# EAGLE board higheTemp (EAGLE 9.5.2)
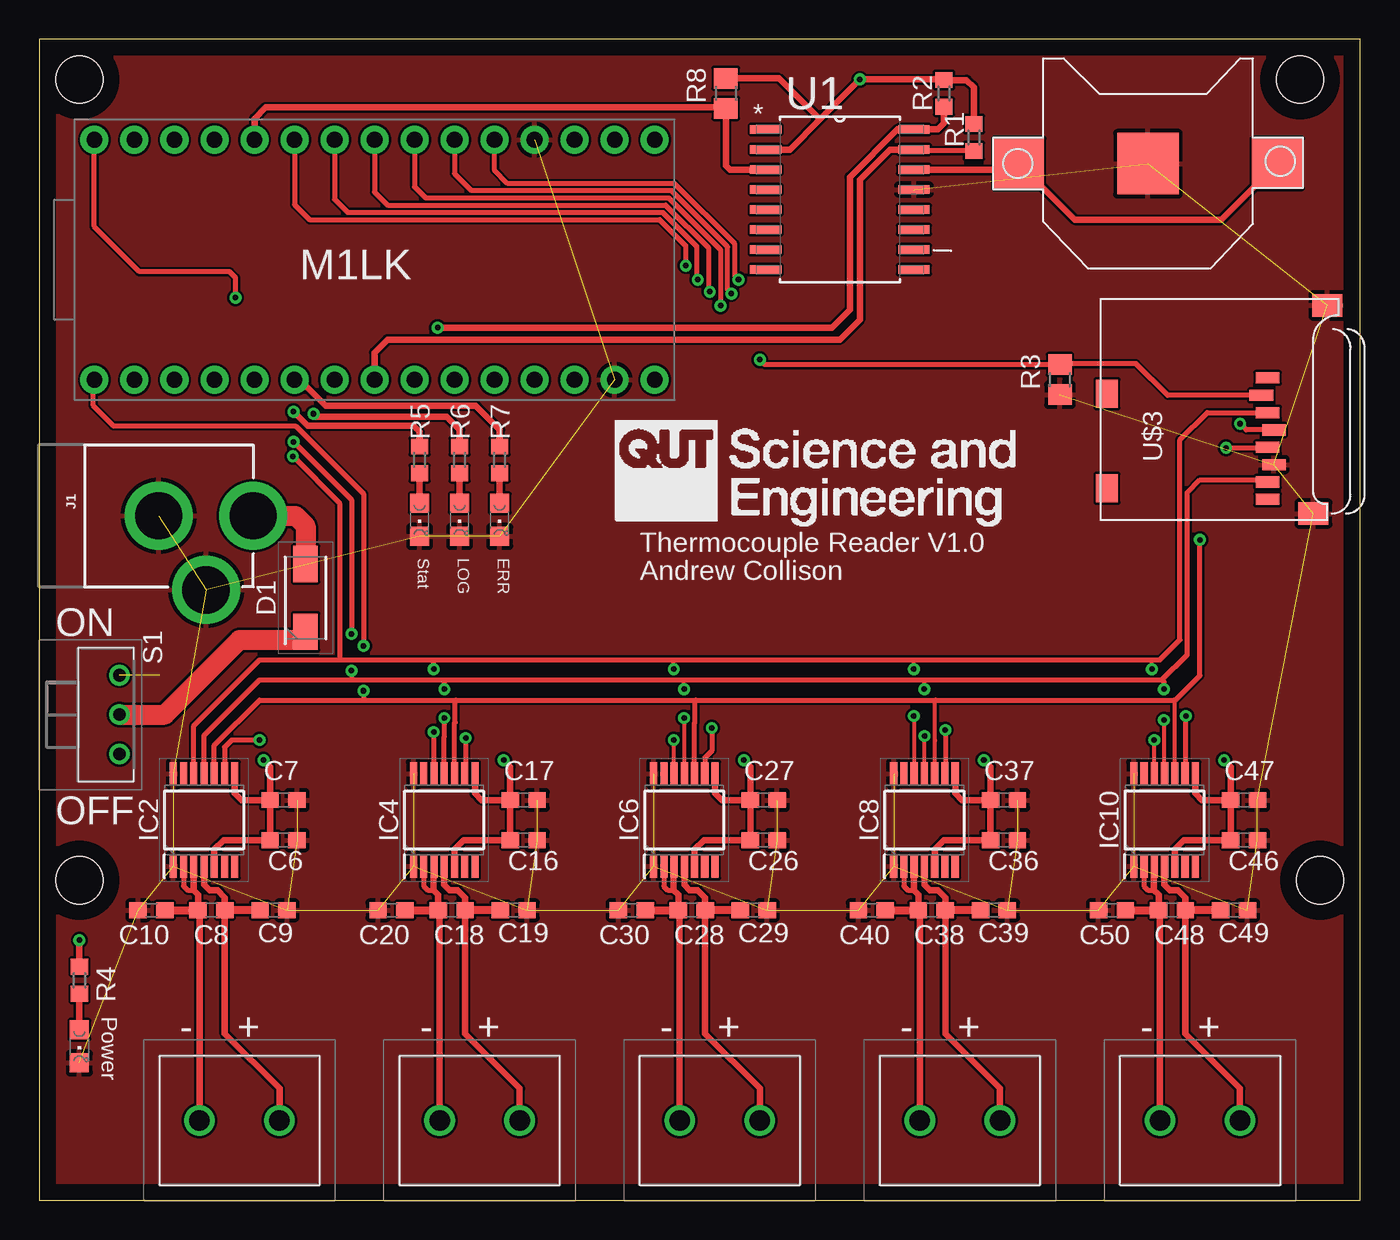
[diagram p0: board, top side]
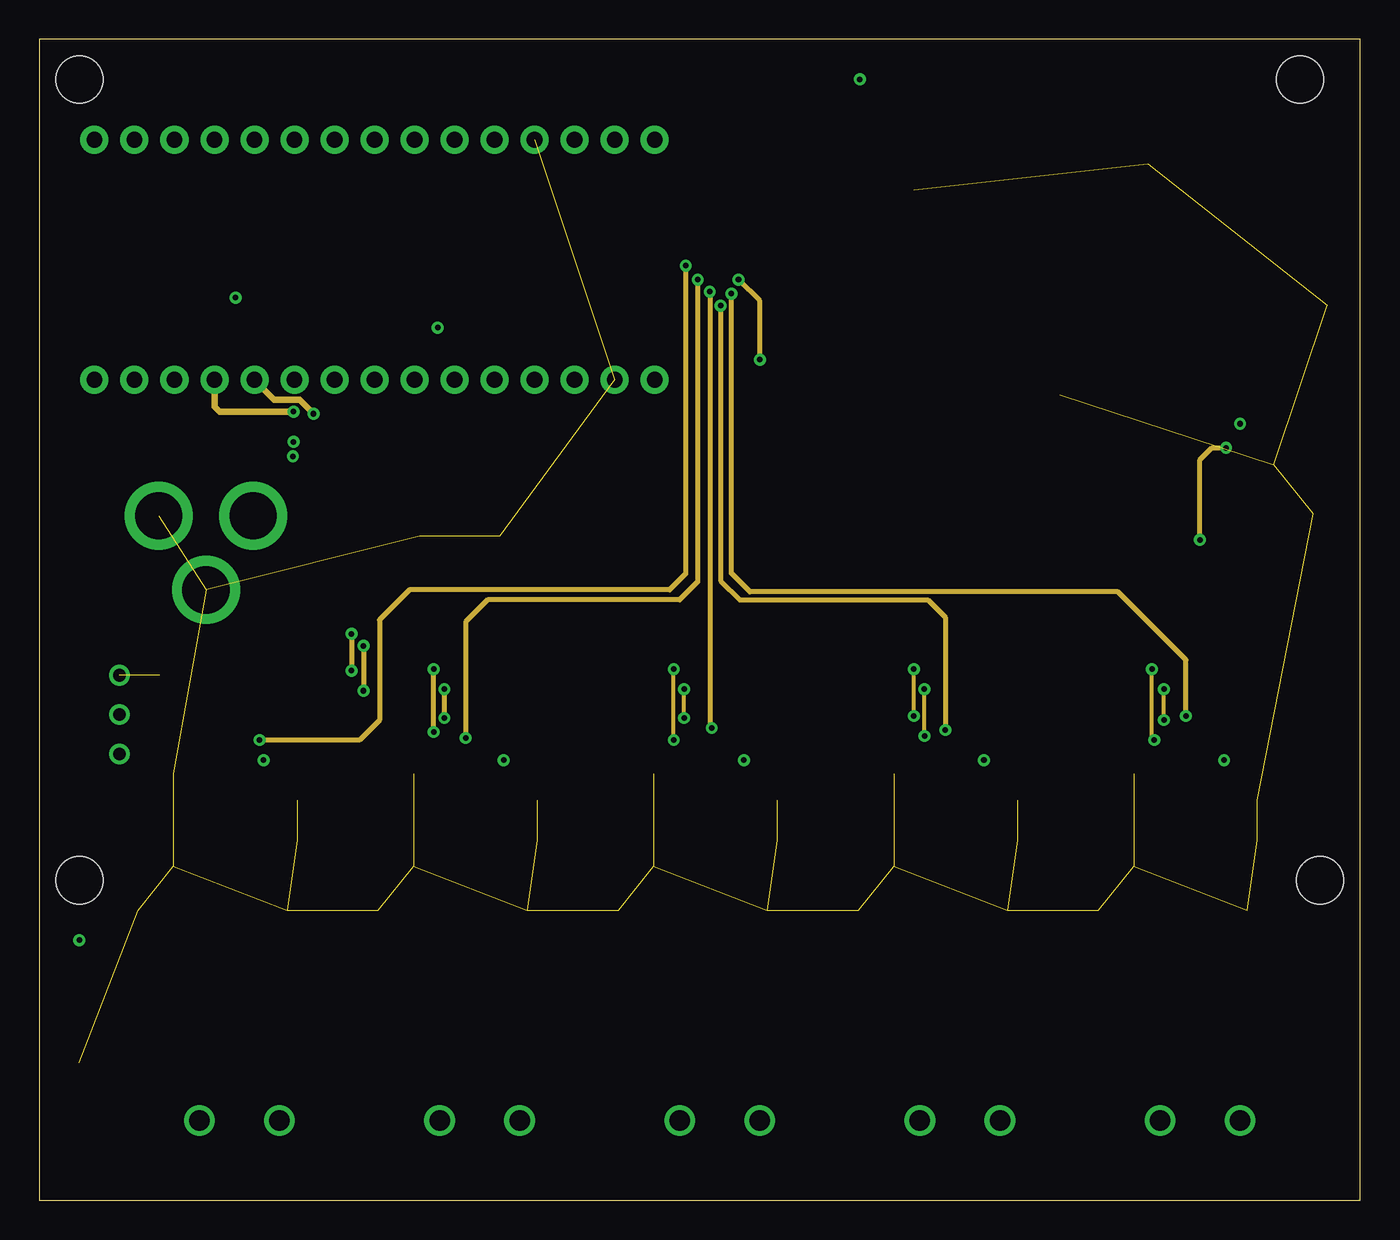
[diagram p1: board, inner layer Route2]
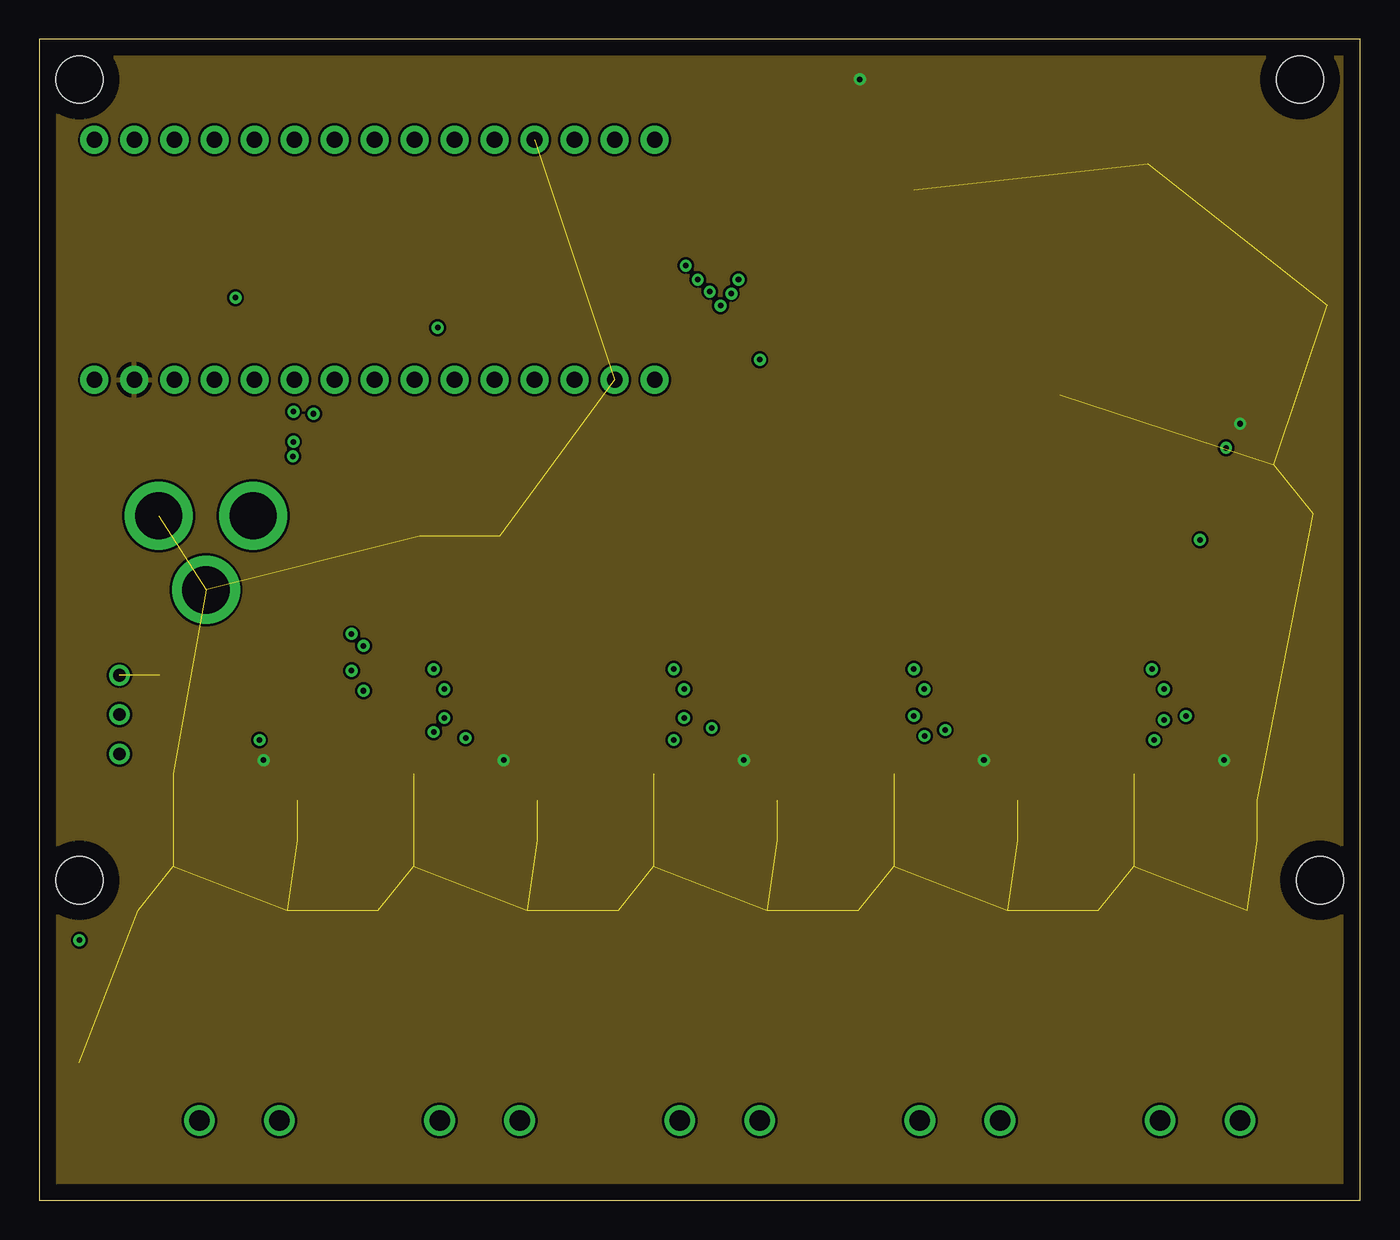
[diagram p2: board, inner layer Route15]
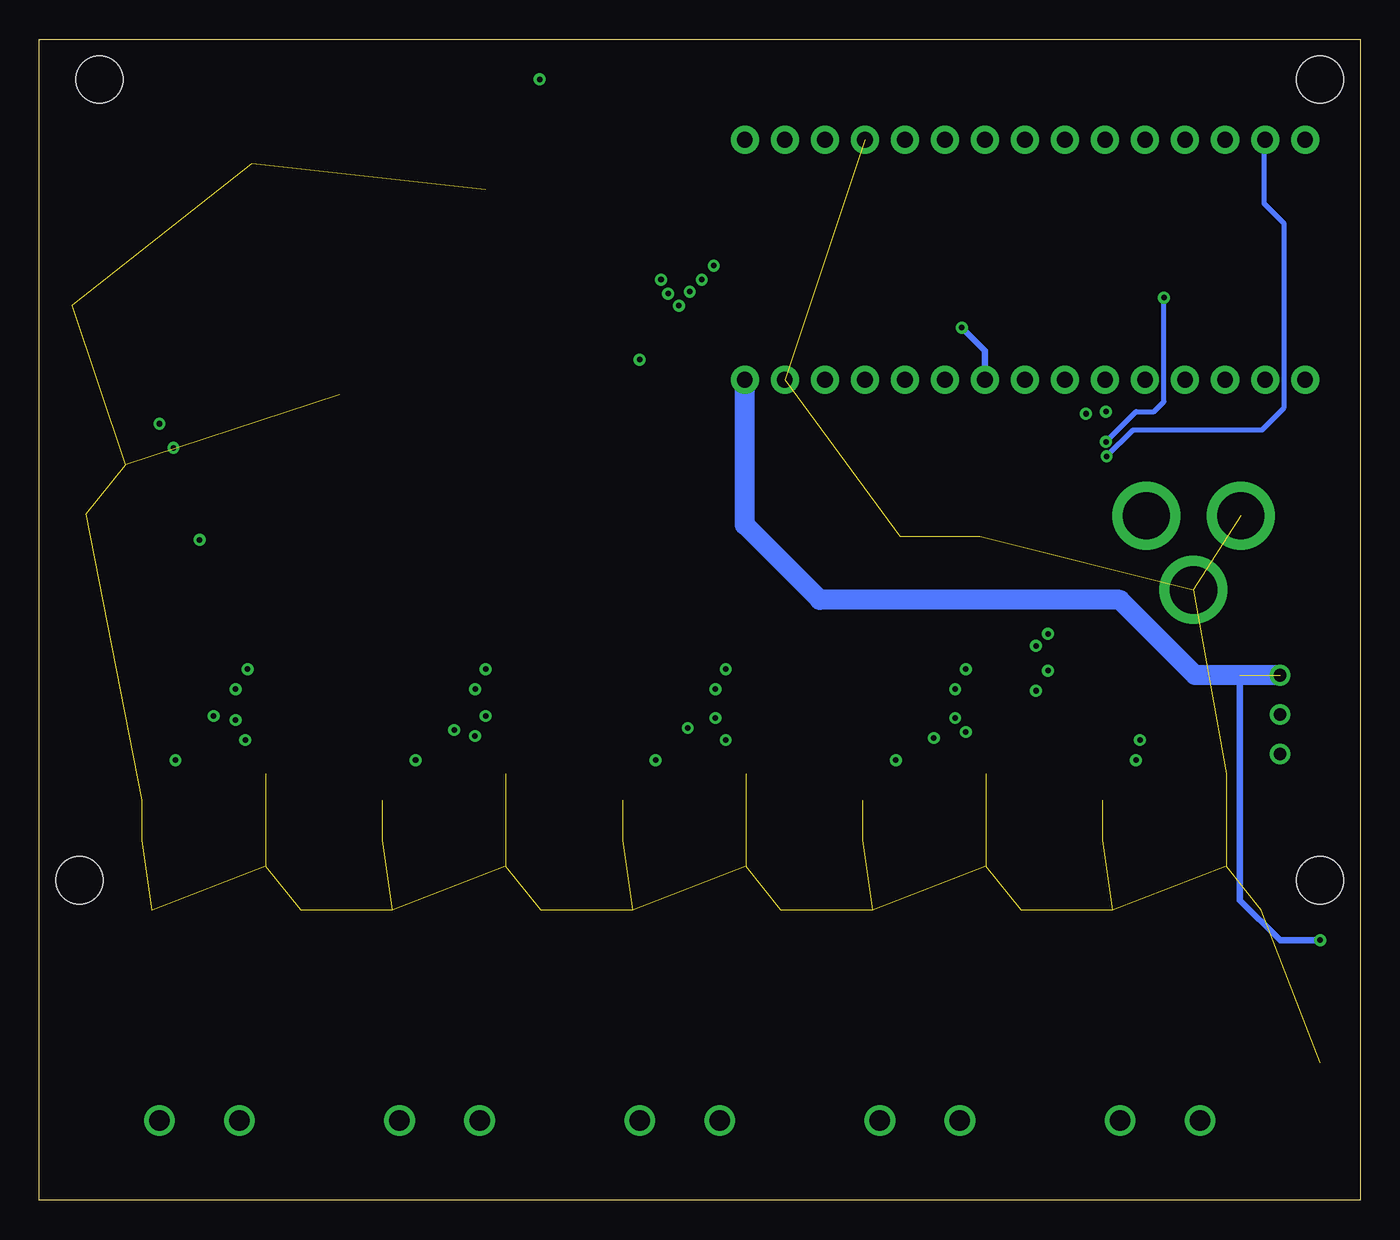
[diagram p3: board, bottom side, seen from below]

Size 83.82 x 73.66 mm. Coordinates in mm from the lower left corner, seen from the top.
Outline: 0,73.66 0,0 83.82,0 83.82,73.66 0,73.66
Copper layers (1+2*15+16): Top 0.035mm / dielectric 1.5mm / Route2 0.035mm / dielectric 0.15mm / Route15 0.035mm / dielectric 0.2mm / Bottom 0.035mm
Design rules "default *": minimum track width 6mil, minimum drill 0.35mm, track to track 6mil, track to pad 6mil, pad to pad 6mil, via to via 6mil, smd to smd 6mil, copper to edge 40mil, drill to drill 6mil, minimum pad ring 10mil, minimum via ring 8mil, stop-mask expansion 4mil, vias tented up to drill 0mil, thermal gap 10mil
Holes 3 mm at 2.54,71.12 2.54,20.32 81.28,20.32 80.01,71.12

## Footprints (pad centres in the part's own frame; a part is rotated, then mirrored left to right if it is on the bottom)
C0603 = smd 1.1 x 1: 1 -0.85,0; 2 0.85,0
DIOM5226X220N = smd 2.3 x 1.55: 1 -2.15,0; 2 2.15,0
SOP65P640X110-14N = smd 1.475 x 0.45: 1 -2.938,1.95; 2 -2.938,1.3; 3 -2.938,0.65; 4 -2.938,0; 5 -2.938,-0.65; 6 -2.938,-1.3; 7 -2.938,-1.95; 8 2.938,-1.95; 9 2.938,-1.3; 10 2.938,-0.65; 11 2.938,0; 12 2.938,0.65; 13 2.938,1.3; 14 2.938,1.95
POWER_JACK_PTH = drill 2.997 pad 4.318: GND 0,7.7; GNDBREAK 4.7,10.7; PWR 0,13.7
TB00650802BE = drill 1.3 pad 1.95: 1 0,0; 2 5.08,0
CHIPLED_0805 = smd 1.2 x 1.2: A 0,-1.05; C 0,1.05
R0603 = smd 1 x 1.1: 1 -0.85,0; 2 0.85,0
R0805 = smd 1.3 x 1.5: 1 -0.95,0; 2 0.95,0
EG1270 = drill 0.8 pad 1.3: 1 0,0; 2 0,2.5; 3 0,5
SOIC127P1032X265-16N = smd 1.981 x 0.533: 1 -4.699,4.445; 2 -4.699,3.175; 3 -4.699,1.905; 4 -4.699,0.635; 5 -4.699,-0.635; 6 -4.699,-1.905; 7 -4.699,-3.175; 8 -4.699,-4.445; 9 4.699,-4.445; 10 4.699,-3.175; 11 4.699,-1.905; 12 4.699,-0.635; 13 4.699,0.635; 14 4.699,1.905; 15 4.699,3.175; 16 4.699,4.445
NANO33IOT = drill 1 pad 1.778: P0 0,0; P1 0,-2.54; P2 0,-5.08; P3 0,-7.62; P4 0,-10.16; P5 0,-12.7; P6 0,-15.24; P7 0,-17.78; P8 0,-20.32; P9 0,-22.86; P10 0,-25.4; P11 0,-27.94; P12 0,-30.48; P13 0,-33.02; P14 0,-35.56; P15 15.24,0; P16 15.24,-2.54; P17 15.24,-5.08; P18 15.24,-7.62; P19 15.24,-10.16; P20 15.24,-12.7; P21 15.24,-15.24; P22 15.24,-17.78; P23 15.24,-20.32; P24 15.24,-22.86; P25 15.24,-25.4; P26 15.24,-27.94; P27 15.24,-30.48; P28 15.24,-33.02; P29 15.24,-35.56
CR1220-SMD = smd 3.2 x 3.2: +$1 -8.2,0; +$2 8.2,0 | smd 3.9 x 3.9: - 0,0
MICROSD = smd 0.7 x 1.5: 1 9,-10.64; 2 7.9,-10.24; 3 6.8,-10.64; 4 5.7,-11.04; 5 4.6,-10.64; 6 3.5,-11.04; 7 2.4,-10.64; 8 1.3,-10.64 | smd 1.8 x 1.4: CD1 2,-0.44; CD2 8,-0.44 | smd 1.4 x 1.9: MT1 0.4,-13.54; MT2 13.6,-14.44

## Placement (x,y rotation side)
C6  0.1uF  [C0603]  15.49,22.86 0 top
C7  0.1uF  [C0603]  15.49,25.4 0 top
C8  0.1uF  [C0603]  10.92,18.41 0 top
C9  0.01uF  [C0603]  14.86,18.41 0 top
C10  0.01uF  [C0603]  7.11,18.41 180 top
C16  0.1uF  [C0603]  30.73,22.86 0 top
C17  0.1uF  [C0603]  30.73,25.4 0 top
C18  0.1uF  [C0603]  26.16,18.41 0 top
C19  0.01uF  [C0603]  30.1,18.41 0 top
C20  0.01uF  [C0603]  22.35,18.41 180 top
C26  0.1uF  [C0603]  45.97,22.86 0 top
C27  0.1uF  [C0603]  45.97,25.4 0 top
C28  0.1uF  [C0603]  41.4,18.41 0 top
C29  0.01uF  [C0603]  45.34,18.41 0 top
C30  0.01uF  [C0603]  37.59,18.41 180 top
C36  0.1uF  [C0603]  61.21,22.86 0 top
C37  0.1uF  [C0603]  61.21,25.4 0 top
C38  0.1uF  [C0603]  56.64,18.41 0 top
C39  0.01uF  [C0603]  60.58,18.41 0 top
C40  0.01uF  [C0603]  52.83,18.41 180 top
C46  0.1uF  [C0603]  76.45,22.86 0 top
C47  0.1uF  [C0603]  76.45,25.4 0 top
C48  0.1uF  [C0603]  71.88,18.41 0 top
C49  0.01uF  [C0603]  75.82,18.41 0 top
C50  0.01uF  [C0603]  68.07,18.41 180 top
D1  MBRA130LT3G  [DIOM5226X220N]  16.89,38.23 90 top
IC2  MAX31856MUD+  [SOP65P640X110-14N]  10.45,24.14 90 top
IC4  MAX31856MUD+  [SOP65P640X110-14N]  25.69,24.14 90 top
IC6  MAX31856MUD+  [SOP65P640X110-14N]  40.93,24.14 90 top
IC8  MAX31856MUD+  [SOP65P640X110-14N]  56.17,24.14 90 top
IC10  MAX31856MUD+  [SOP65P640X110-14N]  71.41,24.14 90 top
J1  POWER_JACK  [POWER_JACK_PTH]  -0.13,43.43 270 top
J3  TB006-508-02BE  [TB00650802BE]  15.24,5.08 180 top
J5  TB006-508-02BE  [TB00650802BE]  30.48,5.08 180 top
J7  TB006-508-02BE  [TB00650802BE]  45.72,5.08 180 top
J9  TB006-508-02BE  [TB00650802BE]  60.96,5.08 180 top
J11  TB006-508-02BE  [TB00650802BE]  76.2,5.08 180 top
LED1  [CHIPLED_0805]  2.54,9.78 180 top
LED2  [CHIPLED_0805]  24.13,43.18 180 top
LED3  [CHIPLED_0805]  26.67,43.18 180 top
LED4  [CHIPLED_0805]  29.21,43.18 180 top
R1  10k  [R0603]  59.31,67.44 90 top
R2  10k  [R0603]  57.4,70.23 270 top
R3  10k  [R0805]  64.77,52.07 90 top
R4  1k  [R0603]  2.54,13.97 90 top
R5  1k  [R0603]  24.13,46.99 270 top
R6  1k  [R0603]  26.67,46.99 270 top
R7  1k  [R0603]  29.21,46.99 270 top
R8  10k  [R0805]  43.56,70.23 90 top
S1  EG1270  [EG1270]  5.08,28.32 0 top
U1  DS3231SN  [SOIC127P1032X265-16N]  50.8,63.5 0 top
U$1  NANO33IOT  [NANO33IOT]  3.49,52.06 90 top
U$2  [CR1220-SMD]  70.36,65.79 0 top
U$3  MICROSD  [MICROSD]  67.31,43.18 90 top

## Library data of the parts
C6-C10 C16-C20 C26-C30 C36-C40 C46-C50 = rcl; SPICEPREFIX: C
D1 = SamacSys_Parts; HEIGHT: 2.2mm; MANUFACTURER_NAME: ON Semiconductor; MANUFACTURER_PART_NUMBER: MBRA130LT3G; MOUSER_PART_NUMBER: 863-MBRA130LT3G; MOUSER_PRICE-STOCK: https://www.mouser.com/Search/Refine.aspx?Keyword=863-MBRA130LT3G
IC2 IC4 IC6 IC8 IC10 = SamacSys_Parts; DESCRIPTION: MAXIM INTEGRATED PRODUCTS - MAX31856MUD+ - TEMPERATURE SENSOR, 2DEG C, TSSOP-14; HEIGHT: 1.1mm; MANUFACTURER_NAME: Maxim Integrated; MANUFACTURER_PART_NUMBER: MAX31856MUD+; MOUSER_PART_NUMBER: 700-MAX31856MUD+; MOUSER_PRICE-STOCK: https://www.mouser.com/Search/Refine.aspx?Keyword=700-MAX31856MUD%2B
J1 = SparkFun-Connectors; PROD_ID: CONN-08197
J3 J5 J7 J9 J11 = SamacSys_Parts; DESCRIPTION: Fixed Terminal Blocks screw type, 5.08 , horizontal, 2 poles, CUI Blue, slotted screw, PCB mount; HEIGHT: 10.4mm; MANUFACTURER_NAME: CUI Devices; MANUFACTURER_PART_NUMBER: TB006-508-02BE; MOUSER_PART_NUMBER: 490-TB006-508-02BE; MOUSER_PRICE-STOCK: https://www.mouser.co.uk/ProductDetail/CUI-Devices/TB006-508-02BE?qs=vLWxofP3U2wEdOVV%2FaT04w%3D%3D
LED1-LED4 = led
R1-R8 = rcl; SPICEPREFIX: R
S1 = SamacSys_Parts; DESCRIPTION: E-SWITCH - EG1270 - SWITCH, SLIDE, SPDT, 300mA, 6V, PCB; HEIGHT: 4.6mm; MANUFACTURER_NAME: E-Switch; MANUFACTURER_PART_NUMBER: EG1270; MOUSER_PART_NUMBER: 612-EG1270; MOUSER_PRICE-STOCK: https://www.mouser.co.uk/ProductDetail/E-Switch/EG1270?qs=xDsBkp9LkodMM2ilVTltow%3D%3D
U1 = Maxim_By_element14_Batch_1; MPN: DS3231SN#; OC_FARNELL: 1593292; OC_NEWARK: 68K3406; PACKAGE: SOIC-16; SUPPLIER: Maxim
U$1 = AndrewFootprint
U$2 U$3 = adafruit

## Nets
3V3: C6.1 C7.1 C16.1 C17.1 C26.1 C27.1 C36.1 C37.1 C46.1 C47.1 IC2.5 IC2.8 IC4.5 IC4.8 IC6.5 IC6.8 IC8.5 IC8.8 IC10.5 IC10.8 R1.2 R2.1 R8.2 U1.2 U$1.P1 U$3.4
A0: R5.1 U$1.P3
A1: R6.1 U$1.P4
A2: R7.1 U$1.P5
A3: U$1.P6
D2: R3.2 U$1.P25 U$3.2
D3: IC10.9 U$1.P24
D4: IC8.9 U$1.P23
D5: IC6.9 U$1.P22
D6: IC4.9 U$1.P21
D7: IC2.9 U$1.P20
D8: R8.1 U1.3 U$1.P19
D9: U$1.P18
D10: U$1.P17
GND: C6.2 C7.2 C9.2 C10.2 C16.2 C17.2 C19.2 C20.2 C26.2 C27.2 C29.2 C30.2 C36.2 C37.2 C39.2 C40.2 C46.2 C47.2 C49.2 C50.2 IC2.1 IC2.14 IC4.1 IC4.14 IC6.1 IC6.14 IC8.1 IC8.14 IC10.1 IC10.14 J1.GND J1.GNDBREAK LED1.C LED2.C LED3.C LED4.C R3.1 U1.13 U$1.P13 U$1.P26 U$2.- U$3.6 U$3.MT1 U$3.MT2
MISO: IC2.11 IC4.11 IC6.11 IC8.11 IC10.11 U$1.P15 U$3.7
MOSI: IC2.12 IC4.12 IC6.12 IC8.12 IC10.12 U$1.P16 U$3.3
N$1: U1.14 U$2.+$1 U$2.+$2
N$2: D1.2 J1.PWR
N$3: U$1.P2
N$4: LED1.A R4.1
N$6: D1.1 S1.2
N$8: IC2.13
N$10: R4.2 S1.3 U$1.P14
N$11: U$1.P9
N$12: IC4.13
N$13: LED2.A R5.2
N$14: IC6.13
N$16: IC8.13
N$17: LED4.A R7.2
N$18: IC10.13
N$20: U$1.P27
N$21: U$1.P28
N$22: U$1.P29
N$26: LED3.A R6.2
SCK: IC2.10 IC4.10 IC6.10 IC8.10 IC10.10 U$1.P0 U$3.5
SCL: R2.2 U1.16 U$1.P8
SDA: R1.1 U1.15 U$1.P7
T1+1: C8.2 C9.1 IC2.4 J3.1
T1+3: C18.2 C19.1 IC4.4 J5.1
T1+5: C28.2 C29.1 IC6.4 J7.1
T1+7: C38.2 C39.1 IC8.4 J9.1
T1+9: C48.2 C49.1 IC10.4 J11.1
T1-1: C8.1 C10.1 IC2.2 IC2.3 J3.2
T1-3: C18.1 C20.1 IC4.2 IC4.3 J5.2
T1-5: C28.1 C30.1 IC6.2 IC6.3 J7.2
T1-7: C38.1 C40.1 IC8.2 IC8.3 J9.2
T1-9: C48.1 C50.1 IC10.2 IC10.3 J11.2

## Tracks (layer width: path | path; a pad name or v marks a point on that pad's centre or on a via)
3V3  (via drill 0.35)
  Top 0.305: U$3.4 76.6,48.88 v76.2,49.28
  Top 0.406: IC2.5 11.1,22.28 11.68,22.86 C6.1 C7.1 | IC2.8 12.4,25.83 12.83,25.4 C7.1 | C7.1 14.64,27.52 v14.22,27.94 | IC4.5 26.34,22.28 26.92,22.86 C16.1 C17.1 | IC4.8 27.64,25.83 28.07,25.4 C17.1 | C17.1 29.88,27.52 v29.46,27.94 | IC6.5 41.58,22.28 42.16,22.86 C26.1 C27.1 | IC6.8 42.88,25.83 43.31,25.4 C27.1 | C27.1 45.12,27.52 v44.7,27.94 | IC8.5 56.82,22.28 57.4,22.86 C36.1 C37.1 | IC8.8 58.12,25.83 58.55,25.4 C37.1 | C37.1 60.36,27.52 v59.94,27.94 | IC10.5 72.06,22.28 72.64,22.86 C46.1 C47.1 | IC10.8 73.36,25.83 73.79,25.4 C47.1 | C47.1 75.6,27.52 v75.18,27.94 | U1.2 47.62,66.67 49.53,68.58 | 49.53,68.58 v52.07,71.12 57.37,71.12 | R2.1 58.84,71.08 59.31,70.61 R1.2 | 49.53,68.58 46.93,71.18 R8.2
  Top 0.813: 57.37,71.12 R2.1
  pour Route15: -3.81,77.47 -3.81,-3.81 87.63,-3.81 87.63,-2.54 87.63,77.47
A0  (via drill 0.35)
  Top 0.406: R5.1 24.13,48.77 23.75,49.15 17.02,49.15 v16.13,50.04
  Route2 0.406: v16.13,50.04 11.43,50.04 11.11,50.36 U$1.P3
A1  (via drill 0.35)
  Top 0.406: R6.1 26.67,48.89 25.86,49.71 17.4,49.71 v17.4,49.91
  Route2 0.406: v17.4,49.91 16.51,50.8 14.91,50.8 U$1.P4
A2
  Top 0.406: R7.1 29.21,48.89 27.69,50.42 18.16,50.42 16.52,52.06 U$1.P5
D2  (via drill 0.35)
  Top 0.305: U$3.2 71.6,51.08 69.6,53.09 64.84,53.09 R3.2 46.04,53.02 v45.72,53.34 | v44.37,58.42 44.14,58.65 44.14,60.69 40.32,64.52 29.72,64.52 28.89,65.34 U$1.P25
  Route2 0.305: v45.72,53.34 45.72,57.07 v44.37,58.42
D3  (via drill 0.35)
  Top 0.305: U$1.P24 26.35,65.14 27.43,64.06 34.29,64.06 34.8,64.06 40.13,64.06 43.69,60.5 43.69,57.76 v43.91,57.53 | IC10.9 72.77,27.14 v72.77,30.73
  Route2 0.305: v72.77,30.73 72.77,34.29 68.45,38.61 45.09,38.61 43.91,39.78 v43.91,57.53
D4  (via drill 0.35)
  Top 0.305: U$1.P23 23.81,64.3 24.51,63.6 39.94,63.6 43.23,60.31 v43.23,56.77 | v57.49,29.84 57.49,27.1 IC8.9
  Route2 0.305: v43.23,56.77 43.23,39.32 44.45,38.1 56.39,38.1 57.49,36.99 v57.49,29.84
D5  (via drill 0.35)
  Top 0.305: U$1.P22 21.27,63.97 22.1,63.14 39.75,63.14 42.47,60.43 42.47,57.74 v42.55,57.66 | v42.67,29.97 42.67,28.54 42.23,28.09 IC6.9
  Route2 0.305: v42.55,57.66 42.55,30.1 v42.67,29.97
D6  (via drill 0.35)
  Top 0.305: U$1.P21 18.73,63.52 19.56,62.69 39.56,62.69 41.7,60.54 41.7,58.5 v41.78,58.42 | v27.05,29.34 27.05,27.14 IC4.9
  Route2 0.305: v27.05,29.34 27.05,36.7 28.45,38.1 40.64,38.1 41.78,39.24 v41.78,58.42
D7  (via drill 0.35)
  Top 0.305: IC2.9 11.75,28.77 12.19,29.21 v13.97,29.21 | U$1.P20 16.19,63.19 17.14,62.23 39.37,62.23 41.02,60.58 v41.02,59.31
  Route2 0.305: v41.02,59.31 41.02,39.75 40.01,38.73 23.5,38.73 21.59,36.83 21.59,30.48 20.32,29.21 v13.97,29.21
D8
  Top 0.406: U1.3 43.81,65.41 43.56,65.66 R8.1 43.5,69.34 14.35,69.34 13.65,68.64 U$1.P19
GND  (43 unrouted)
  pour Top: -2.54,74.93 -2.54,-2.54 6.35,-2.54 86.36,-2.54 86.36,0 86.36,76.2 83.82,76.2 -2.54,76.2
MISO  (via drill 0.35)
  Top 0.254: IC6.11 40.93,30.59 v40.92,30.61 | v40.92,32.43 40.92,33 40.89,33.02 | IC8.11 v56.17,29.46 v56.18,29.46 | v56.16,32.43 56.16,33 56.13,33.02 | IC10.11 71.41,30.44 v71.37,30.48 | 71.37,32.89 v71.37,32.43
  Top 0.305: v12.45,57.28 12.45,58.55 12.06,58.93 6.35,58.93 3.49,61.79 U$1.P15 | 19.81,33.02 13.97,33.02 10.45,29.5 IC2.11 | 19.81,33.02 25.78,33.02 | 25.78,33.02 40.89,33.02 56.13,33.02 71.25,33.02 | v25.7,30.61 25.7,29.43 25.69,29.42 IC4.11 | v25.7,32.43 25.7,32.94 25.78,33.02 | 71.25,33.02 71.37,32.89 | v19.81,33.61 19.81,33.02 | v16.13,48.13 19.81,44.45 v19.81,35.94 | 71.25,33.02 72.85,34.62 72.85,44.91 73.66,45.72 77.81,45.72 U$3.7
  Route2 0.254: v40.92,30.61 v40.92,32.43 | v56.18,29.46 56.18,32.41 v56.16,32.43 | v71.37,30.48 v71.37,32.43
  Route2 0.305: v25.7,30.61 v25.7,32.43 | v19.81,35.94 v19.81,33.61
  Bottom 0.305: v16.13,48.13 14.22,50.04 13.08,50.04 12.45,50.67 v12.45,57.28
MOSI  (via drill 0.35)
  Top 0.254: IC6.12 40.28,29.19 v40.26,29.21 | v40.26,33.7 40.26,34.29 | IC8.12 55.52,30.71 v55.5,30.73 | v55.5,33.7 55.5,34.29 | IC10.12 v70.75,29.21 | v70.61,33.7 70.61,34.29
  Top 0.305: 19.05,34.29 13.97,34.29 9.8,30.12 IC2.12 | 19.05,34.29 25.02,34.29 | 25.02,34.29 40.26,34.29 55.5,34.29 70.61,34.29 71.12,34.29 72.39,35.56 72.39,48.26 74.11,49.98 U$3.3 | IC4.12 25.04,29.7 v25.02,29.72 | v25.02,33.7 25.02,34.29 | v16.09,47.21 19.05,44.25 19.05,34.29
  Route2 0.254: v40.26,29.21 v40.26,33.7 | v55.5,30.73 v55.5,33.7 | v70.75,29.21 70.61,29.35 v70.61,33.7
  Route2 0.305: v25.02,29.72 v25.02,33.7
  Bottom 0.305: v16.09,47.21 14.4,48.89 6.22,48.89 4.83,50.29 4.83,61.98 6.1,63.25 6.1,67.23 U$1.P16
N$1
  Top 0.406: U1.14 61.78,65.41 U$2.+$1 65.71,62.23 75,62.23 U$2.+$2
N$2
  Top 1.27: J1.PWR 16.26,43.43 16.89,42.8 D1.2
N$4
  Top 0.406: LED1.A R4.1
N$6
  Top 1.016: 16.37,35.56 D1.1
  Top 1.27: S1.2 7.96,30.82 12.7,35.56 16.37,35.56
N$10  (via drill 0.35)  (1 unrouted)
  Top 0.406: R4.2 v2.54,16.51
  Bottom 0.406: v2.54,16.51 5.08,16.51 7.62,19.05 7.62,33.32
  Bottom 1.27: U$1.P14 39.05,42.86 34.29,38.1 15.24,38.1 10.46,33.32 S1.3
N$13
  Top 0.406: R5.2 LED2.A
N$17
  Top 0.406: R7.2 LED4.A
N$26
  Top 0.406: R6.2 LED3.A
SCK  (via drill 0.35)
  Top 0.254: IC8.10 56.82,29.18 56.84,29.19 56.84,31.69 56.9,31.75 | IC10.10 72.06,31.7 72.01,31.75
  Top 0.305: U$1.P0 3.43,52 3.43,50.42 4.7,49.15 16.26,49.15 20.57,44.83 v20.57,35.18 | 20.57,31.75 13.97,31.75 11.1,28.88 IC2.10 | 20.57,31.75 26.42,31.75 | 26.42,31.75 41.66,31.75 | 41.66,31.75 56.9,31.75 72.01,31.75 | 26.42,31.75 26.39,31.72 26.39,30.32 26.34,30.28 IC4.10 | v20.57,32.34 20.57,31.75 | 72.06,31.7 73.66,33.3 v73.66,41.91 | v75.31,47.75 77.92,47.75 U$3.5 | IC6.10 41.58,30.3 41.6,30.32 41.6,31.69 41.66,31.75
  Route2 0.305: v20.57,35.18 v20.57,32.34 | v73.66,41.91 73.66,46.99 74.42,47.75 v75.31,47.75
SCL  (via drill 0.35)
  Top 0.406: v25.27,55.37 50.29,55.37 51.44,56.52 51.44,64.92 54.45,67.94 U1.16 57.02,67.94 57.4,68.33 R2.2
  Bottom 0.406: v25.27,55.37 23.81,53.91 U$1.P8
SDA
  Top 0.305: U1.15 55.59,66.59 R1.1
  Top 0.406: U1.15 53.98,66.67 52.07,64.77 52.07,55.88 50.8,54.61 22.1,54.61 21.27,53.78 U$1.P7
T1+1
  Top 0.406: IC2.4 10.45,20.03 10.79,19.68 11.3,19.68 11.77,19.22 C8.2 11.77,10.58 15.24,7.11 J3.1
  Top 0.508: C9.1 C8.2
T1+3
  Top 0.406: IC4.4 25.69,20.03 26.04,19.68 26.54,19.68 27.01,19.22 C18.2 27.01,10.58 30.48,7.11 J5.1
  Top 0.508: C19.1 C18.2
T1+5
  Top 0.406: IC6.4 40.93,20.03 41.27,19.68 41.78,19.68 42.25,19.22 C28.2 42.25,10.58 45.72,7.11 J7.1
  Top 0.508: C29.1 C28.2
T1+7
  Top 0.406: IC8.4 56.17,20.03 56.52,19.68 57.02,19.68 57.49,19.22 C38.2 57.49,10.58 60.96,7.11 J9.1
  Top 0.508: C39.1 C38.2
T1+9
  Top 0.406: IC10.4 71.41,20.03 71.75,19.68 72.26,19.68 72.73,19.22 C48.2 72.73,10.58 76.2,7.11 J11.1
  Top 0.508: C49.1 C48.2
T1-1
  Top 0.305: IC2.2 9.15,19.95 9.14,19.94 9.4,19.68 9.78,19.68
  Top 0.406: J3.2 10.16,18.33 C8.1 10.07,19.39 9.78,19.68 9.78,21.18 IC2.3
  Top 0.508: C10.1 C8.1
T1-3
  Top 0.305: IC4.2 24.39,19.95 24.38,19.94 24.64,19.68 25.02,19.68
  Top 0.406: J5.2 25.4,18.33 C18.1 25.31,19.39 25.02,19.68 25.02,21.18 IC4.3
  Top 0.508: C20.1 C18.1
T1-5
  Top 0.305: IC6.2 39.63,19.95 39.62,19.94 39.88,19.68 40.26,19.68
  Top 0.406: J7.2 40.64,18.33 C28.1 40.55,19.39 40.26,19.68 40.26,21.18 IC6.3
  Top 0.508: C30.1 C28.1
T1-7
  Top 0.305: IC8.2 54.87,19.95 54.86,19.94 55.12,19.68 55.5,19.68
  Top 0.406: J9.2 55.88,18.33 C38.1 55.79,19.39 55.5,19.68 55.5,21.18 IC8.3
  Top 0.508: C40.1 C38.1
T1-9
  Top 0.305: IC10.2 70.11,19.95 70.1,19.94 70.36,19.68 70.74,19.68
  Top 0.406: J11.2 71.12,18.33 C48.1 71.03,19.39 70.74,19.68 70.74,21.18 IC10.3
  Top 0.508: C50.1 C48.1

## Text on the board
tPlace: M1LK | Stat | LOG | ERR
tNames: Thermocouple Reader V1.0 | Andrew Collison | ON | OFF | Power | - + | - + | - + | - + | - +